# Altium PCB M74R3.PcbDoc
Units mm, origin at the board's own origin, x right, y up, seen from the top; angles counter-clockwise.
Board outline 65.25 x 17.5 mm, 2 copper layers (L1-Top Layer, L2-Botom Layer), stack 1.579 mm thick; 80 components, 38 nets, 192 pads, 52 vias.
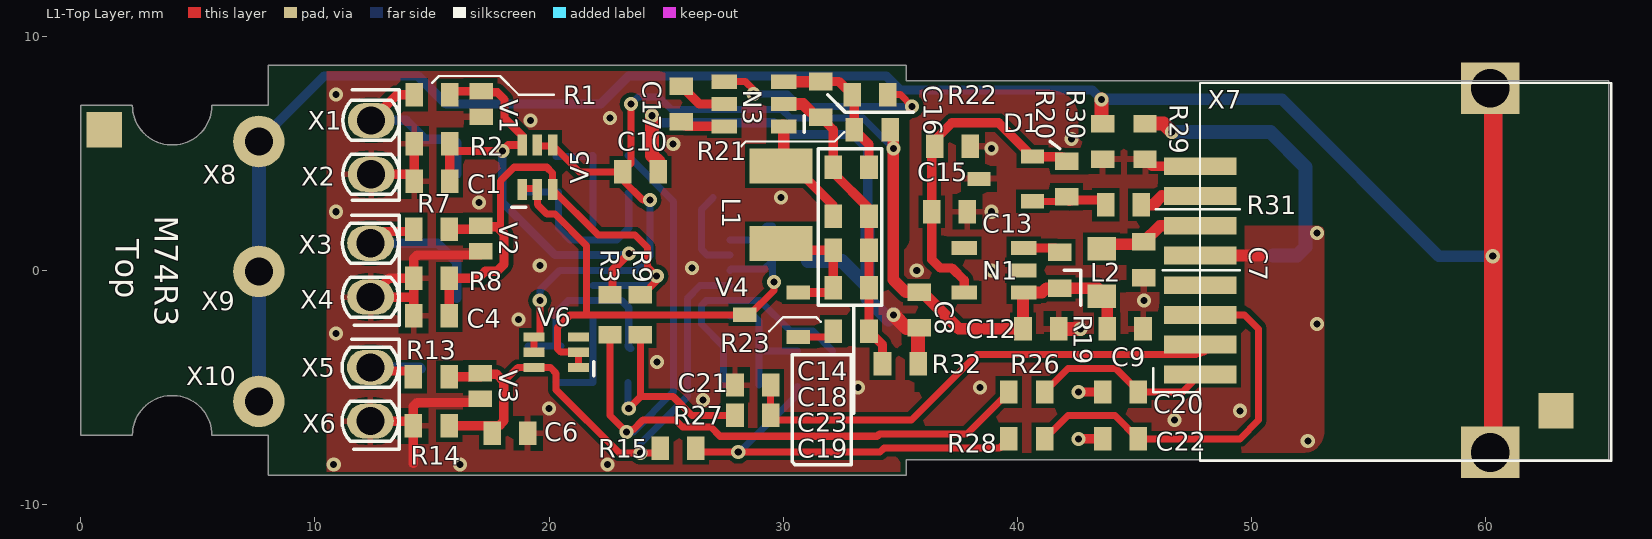
[diagram p0: L1-Top Layer view]
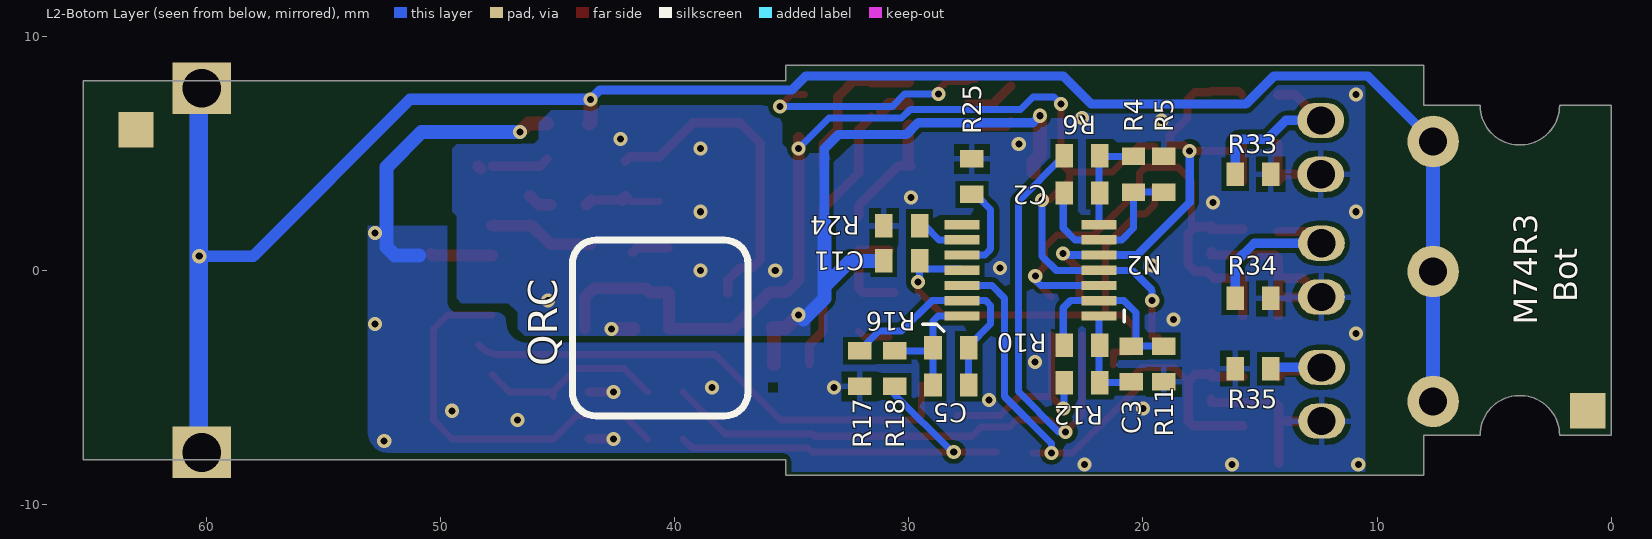
[diagram p1: L2-Botom Layer view, seen from below]

## Layer stack, top to bottom
Top Solder: solder mask 0.0102, Solder Resist, Dk 3.5
L1-Top Layer: signal copper 0.0356
Dielectric 1: dielectric 1.508, FR-4, Dk 4.8
L2-Botom Layer: signal copper 0.0356
Bottom Solder: solder mask 0.0102, Solder Resist, Dk 3.5

## Board outline
0,-7.05 2.2,-7.05 cw(c3.9,-7.05) 5.6,-7.05 8,-7.05 8,-8.75 35.25,-8.75 35.25,-8.1 65.25,-8.1 65.25,8.1 35.25,8.1 35.25,8.75 8,8.75 8,7.05 5.6,7.05 cw(c3.9,7.05) 2.2,7.05 0,7.05

## Design rules (kind name [scope] priority, off if disabled: settings)
Clearance [All] p1: gap=0.2 ignorepadtopadclearanceinfootprint=TRUE
ComponentClearance [All] p1 off: gap=0 collisioncheckmode=3 verticalgap=0 showdistances=FALSE
FanoutControl Fanout_LCC [IsLCC] p1: bgadir=Out bgaviamode=Centered fanoutstyle=Auto fanoutdirection=Alternating viagrid=0.025 // Fanout_LCC (Default Rule)
FanoutControl Fanout_BGA [IsBGA] p2: bgadir=Out bgaviamode=Centered fanoutstyle=Auto fanoutdirection=Alternating viagrid=0.025 // Fanout_BGA (Default Rule)
FanoutControl Fanout_Small [(CompPinCount < 5)] p3: bgadir=Out bgaviamode=Centered fanoutstyle=Auto fanoutdirection=OutThenIn viagrid=0.025 // Fanout_Small (Default Rule)
FanoutControl Fanout_SOIC [IsSOIC] p4: bgadir=Out bgaviamode=Centered fanoutstyle=Auto fanoutdirection=Alternating viagrid=0.025 // Fanout_SOIC (Default Rule)
PolygonConnect PolygonConnect_via [isVia] p1: connectstyle=Direct reliefconductorwidth=0.254 reliefentries=4 polygonreliefangle="90 Angle" airgapwidth=0.254
PolygonConnect [All] p2: connectstyle=Relief reliefconductorwidth=0.254 reliefentries=4 polygonreliefangle="90 Angle" airgapwidth=0.254
RoutingVias [All] p1: holewidth=0.5 width=0.8 viastyle="Through Hole" minholewidth=0.1 minwidth=0.4 maxholewidth=1.3 maxwidth=2
SolderMaskExpansion [All] p1: expansion=0.102 istentingtop=FALSE
SupplyNets "Schematic Supply Nets_6" [InNet('PGND1')] p1: voltage=0.000
SupplyNets "Schematic Supply Nets_5" [InNet('-5V')] p2: voltage=0.000
SupplyNets "Schematic Supply Nets_4" [InNet('GNDSIG')] p3: voltage=0.000
SupplyNets "Schematic Supply Nets_2" [InNet('+5V_IN')] p4: voltage=0.000
SupplyNets "Schematic Supply Nets_1" [InNet('GND')] p5: voltage=0.000
SupplyNets "Schematic Supply Nets" [InNet('+5V')] p6: voltage=0.000
Width [All] p1: maxlimit=8 minlimit=0.254 preferedwidth=0.254
25 further rules are at their usual default settings.

## Components (designator, comment, footprint, x,y, rotation, side; value= is the part's Value field where it differs from the comment)
C1 "10n" Z0603#1 15,3.8 r180 top
C2 "*47p" Z0603#1 22.6,3.3 r0 bottom
C3 "*47p" Z0603#1 20.5,-4 r90 bottom
C4 "10n" Z0603#1 14.973,-1.945 r180 top
C5 "*47p" Z0603#1 28.2,-4.9 r180 bottom
C6 "10n" Z0603#1 18.33,-6.959 r0 top
C7 "10u" Z0603#1 45.4,0.45 r270 top
C8 "1u0" Z0603#1 35.8,-1.7 r270 top
C9 "100n" Z0603#1 44.6,-2.5 r0 top
C10 "33n" Z0603#1 23.9,4.2 r0 top
C11 "33n" Z0603#1 30.3,0.4 r0 bottom
C12 "10u" Z0603#1 41,-2.5 r0 top
C13 "10u" Z0603#1 37.1,2.5 r0 top
C14 "10u" Z0603#1 32.9,4.4 r0 top
C15 "33n" Z0603#1 37.23,5.295 r0 top
C16 "33n" Z0603#1 31.6,7.3 r90 top
C17 "1u0" Z0603#1 25.649,7.1 r90 top
C18 "10u" Z0603#1 32.9,2.3 r180 top
C19 "10u" Z0603#1 32.9,-0.751 r180 top
C20 "*47p" Z0603#1 44.4,-5.2 r180 top
C21 "*47p" Z0603#1 28.7,-4.9 r180 top
C22 "*47p" Z0603#1 44.4,-7.2 r180 top
C23 "100n" Z0603#1 32.9,0.849 r0 top
D1 "11AA010T-I/TT" ZSOT23A 39.5,3.9 r180 top
L1 "150uH" Z1210 29.9,2.8 r270 top
L2 "BLM21PG221SN1D" Z0805 43.6,-0.1 r90 top
N1 "TPS70933DBV" ZSOT23_5 39,0 r180 top
N2 "OPA4991IPWR" ZTSSOP14 24.8,0 r0 bottom
N3 "LM2776DBVT" ZSOT23_6 28.749,7.1 r180 top
R1 "1K0" Z0603#1 15,7.5 r0 top
R2 "220K" Z0603#1 15,5.4 r180 top
R3 "*0R0" Z0603#2 22.6,-1.9 r270 top
R4 "5K1" Z0603#1 20.4,4.1 r270 bottom
R5 "1K0" Z0603#1 19.1,4.1 r90 bottom
R6 "100R" Z0603#1 22.6,4.9 r0 bottom
R7 "1K0" Z0603#1 14.973,1.755 r0 top
R8 "220K" Z0603#1 14.973,-0.345 r180 top
R9 "*0R0" Z0603#2 23.9,-1.9 r270 top
R10 "5K1" Z0603#1 22.6,-3.2 r0 bottom
R11 "1K0" Z0603#1 19.1,-4 r270 bottom
R12 "100R" Z0603#1 22.6,-4.8 r0 bottom
R13 "1K0" Z0603#1 14.966,-4.545 r0 top
R14 "220K" Z0603#1 14.966,-6.645 r180 top
R15 "*0R0" Z0603#1 25.5,-7.6 r0 top
R16 "5K1" Z0603#1 28.2,-3.3 r180 bottom
R17 "1K0" Z0603#1 32.1,-4.2 r270 bottom
R18 "100R" Z0603#1 30.6,-4.2 r270 bottom
R19 "0R0" Z0603#1 41.8,0 r90 top
R20 "100K" Z0603#1 42.1,3.9 r270 top
R21 "0R0" Z0603#1 33.8,6 r180 top
R22 "10K" Z0603#1 33.7,7.5 r0 top
R23 "1K0" Z0603#1 32.9,-2.6 r180 top
R24 "0R0" Z0603#1 30.3,1.9 r180 bottom
R25 "0R0" Z0603#1 27.3,4 r270 bottom
R26 "0R0" Z0603#1 40.4,-5.2 r0 top
R27 "0R0" Z0603#1 28.7,-6.2 r0 top
R28 "0R0" Z0603#1 40.4,-7.2 r0 top
R29 "0R0" Z0603#1 45.45,5.5 r270 top
R30 "*0R0" Z0603#1 43.65,5.5 r90 top
R31 "56R" Z0603#1 44.525,2.8 r180 top
R32 "0R0" Z0603#3 35,-4 r180 top
R33 "NU 0603" Z0603#3 15.3,4.1 r0 bottom
R34 "NU 0603" Z0603#3 15.3,-1.2 r0 bottom
R35 "NU 0603" Z0603#3 15.3,-4.2 r180 bottom
V1 "*CPDUC1V8HT-HF" ZSOD523F 17.1,7.1 r90 top
V2 "*CPDUC1V8HT-HF" ZSOD523F 17.073,1.355 r90 top
V3 "*CPDUC1V8HT-HF" ZSOD523F 17.066,-4.945 r90 top
V4 "BSH108" ZSOT23 29.5,-1.9 r180 top
V5 "BAT54BRW" ZSOT363 19.5,4.4 r90 top
V6 "BAT54BRW" ZSOT363 20.3,-3.5 r180 top
X1 "*Dira 1,2mm" HOLE_012_P_020x015 12.4,6.4 r0 top
X2 "*Dira 1,2mm" HOLE_012_P_020x015 12.4,4.1 r0 top
X3 "*Dira 1,2mm" HOLE_012_P_020x015 12.373,1.155 r0 top
X4 "*Dira 1,2mm" HOLE_012_P_020x015 12.373,-1.145 r0 top
X5 "*Dira 1,2mm" HOLE_012_P_020x015 12.366,-4.145 r0 top
X6 "*Dira 1,2mm" HOLE_012_P_020x015 12.366,-6.445 r0 top
X7 "RJLSE4238101" RJLSE4238101 53.8,0 r90 top
X8 "*Dira 1.2 mm" HOLE_012_P_022 7.6,5.5 r0 top
X9 "*Dira 1.2 mm" HOLE_012_P_022 7.6,-0.05 r0 top
X10 "*Dira 1.2 mm" HOLE_012_P_022 7.6,-5.6 r0 top

## Footprints (in the part's own frame and the unit in brackets; to place one, negate y for a bottom-side part, rotate by r counter-clockwise, add the part's x,y. Pads: shape width x height; smd on the part's side, far side on the other; paste and mask are expansions set on the pad)
HOLE_012_P_020x015 [mm] "Dira 1.2mm, ovalna ploska 2x1.5mm"
  oval 2x1.5 hole 1.2 mask+0.05: 1(0,0)
  silkscreen extent -1.21,-0.85 1.21,0.85
HOLE_012_P_022 [mm]
  round 2.2 hole 1.2 mask+0.05: 1(0,0)
RJLSE4238101 [mm] "RJ45 flat profile, w/o LED, SMD version"
  rect 0.76x3.1 smd: 1(-4.445,6) 2(-3.175,6) 3(-1.905,6) 4(-0.635,6) 5(0.635,6) 6(1.905,6) 7(3.175,6) 8(4.445,6)
  rect 2.2x2.5 hole 1.65: 9(-7.78,-6.4) 9(7.78,-6.4)
  silkscreen extent -8.13,-11.56 8,8, body extent -8.05,-11.51 8.05,7.09, height 11.96
Z0603#1 [mm]
  rect 0.75x1 smd mask+0.05: 1(-0.762,0) 2(0.762,0)
Z0603#2 [mm]
  rect 0.75x1 smd mask+0.05: 1(-0.862,0) 2(0.862,0)
Z0603#3 [mm]
  rect 0.75x1 smd paste-0.05 mask+0.05: 1(-0.762,0) 2(0.762,0)
Z0805 [mm]
  rect 1x1.2 smd paste-0.06 mask+0.05: 1(-1.016,0) 2(1.016,0)
Z1210 [mm]
  rect 1.5x2.7 smd paste-0.205 mask+0.1: 1(-1.651,0) 2(1.651,0)
ZSOD523F [mm]
  rect 0.7x1 smd paste-0.085 mask+0.05: 1(-0.55,0) 2(0.55,0)
ZSOT23 [mm]
  rect 1x0.6 smd mask+0.05: 1(-1.143,0.952) 2(1.143,0) 3(-1.143,-0.953)
ZSOT23_5 [mm]
  rect 1.1x0.6 smd mask+0.05: 1(-1.27,0.952) 2(-1.27,0) 3(-1.27,-0.953) 4(1.27,-0.952) 5(1.27,0.953)
ZSOT23_6 [mm]
  rect 1.1x0.6 smd mask+0.05: 1(-1.27,0.952) 2(-1.27,0) 3(-1.27,-0.953) 4(1.27,-0.953) 5(1.27,0) 6(1.27,0.952)
ZSOT23A [mm]
  rect 1x0.6 smd mask+0.05: 1(-1.143,0.952) 2(-1.143,-0.953) 3(1.143,0)
ZSOT363 [mm]
  rect 0.9x0.4 smd paste-0.045 mask+0.05: 1(-0.953,0.65) 2(-0.953,0) 3(-0.953,-0.65) 4(0.953,-0.65) 5(0.953,0) 6(0.953,0.65)
ZTSSOP14 [mm]
  rect 1.5x0.4 smd paste-0.115 mask+0.05: 1(-2.921,1.95) 2(-2.921,1.3) 3(-2.921,0.65) 4(-2.921,0) 5(-2.921,-0.65) 6(-2.921,-1.3) 7(-2.921,-1.95) 8(2.921,-1.95) 9(2.921,-1.3) 10(2.921,-0.65) 11(2.921,0) 12(2.921,0.65) 13(2.921,1.3) 14(2.921,1.95)

## Part data
C1 C4 C6: library part C, Tolerance=C0G, Voltage=50V, Assembled=Automat, MEgA_ID=51625, PCB Footprint=Z0603, Size=0603
  C1: Group="Proud I1", Part Reference=C1
  C4: Group="Proud I2", Part Reference=C4
  C6: Group="Proud I3", Part Reference=C6
C2 C3 C5 C20 C21 C22: library part C, Manufacturer=CL10C470JB8NNNC, Tolerance=C0G, Voltage=50V, Assembled=Neosadit, MEgA_ID=51568, PCB Footprint=Z0603, Size=0603
  C2: Group="Proud I1", Part Reference=C2
  C3: Group="Proud I2", Part Reference=C3
  C5: Group="Proud I3", Part Reference=C5
  C20: Group="Proud I1", Part Reference=C20
  C21: Group="Proud I1", Part Reference=C21
  C22: Group="Proud I1", Part Reference=C22
C7: library part C, Manufacturers part Reference=C0603C104K5RACTU, Package=0603, TEMP Grade="-55 to +125", Tolerance=X5R, Voltage=10V, Assembled=Automat, Group="L6A - PLL", MAKE=Kemet, MEgA_ID=51674, Part Reference=C7, PCB Footprint=Z0603, ROHS STATUS=COMPLIANT, Size=0603, TEMPERATURE GRADE="-55 to +125"
C8 C17: library part C, Tolerance=X7R, Voltage=16V, Assembled=Automat, MEgA_ID=51636, PCB Footprint=Z0603, Size=0603
  C8: Group="L6A - PLL", Part Reference=C8
  C17: Group="Měnič +5V/-5V", Part Reference=C17
C9 C10 C11 C15 C16 C23: library part C, Tolerance=X7R, Voltage=50V, Assembled=Automat, PCB Footprint=Z0603, Size=0603
  C9: Group="L6A - PLL", MEgA_ID=51623, Part Reference=C9
  C10: Group="Proud I1", MEgA_ID=51667, Part Reference=C10
  C11: Group="Proud I1", MEgA_ID=51667, Part Reference=C11
  C15: Group="DC 3V3", MEgA_ID=51667, Part Reference=C15
  C16: Group="Měnič +5V/-5V", MEgA_ID=51667, Part Reference=C16
  C23: Group="L6A - PLL", MEgA_ID=51623, Part Reference=C23
C12 C13 C14 C18 C19: library part C, Tolerance=X5R, Voltage=10V, Assembled=Automat, MEgA_ID=51674, PCB Footprint=Z0603, Size=0603
  C12: Group="DC 3V3", Part Reference=C12
  C13: Group="DC 3V3", Part Reference=C13
  C14: Group="Měnič +5V/-5V", Part Reference=C14
  C18: Group="Měnič +5V/-5V", Part Reference=C18
  C19: Group="Měnič +5V/-5V", Part Reference=C19
D1: library part DIODE2_K_0, Assembled=Automat, Group=Paměť, Manufacturer=11AA010T-I/TT, MEgA_ID=55686, Part Reference=D1, PCB Footprint=ZSOT23A, Size=SOT23
L1: library part INDUCTOR, Manufacturer=NLCV32T-151K-EF, Power="100mA  7R9", Assembled=Automat, Group="Měnič +5V/-5V", MEgA_ID=56074, Part Reference=L1, PCB Footprint=Z1210, Size=1210
L2: library part "Ferrite Bead_0", Power="2A 220R", Assembled=Automat, Group="L6A - PLL", MEgA_ID=56029, Part Reference=L2, PCB Footprint=Z0805, Size=0805
N1: library part MCP1801T_1, Power="150 mA", Voltage=3V3, Assembled=Automat, Group="DC 3V3", MEgA_ID=55875, Part Reference=N1, PCB Footprint=ZSOT23_5, Size=SOT23-5
N2: library part AD824, Voltage=5...26V/2.7V...40V, Assembled=Automat, Group="Proud I2", Manufacturer=OPA4991IPWR, MEgA_ID=55657.02, Part Reference=N2, PCB Footprint=ZTSSOP14, Size=TSSOP14
N3: library part LM2776_0, Power=200mA, Voltage=2V7...+5V, Assembled=Automat, Group="Měnič +5V/-5V", Manufacturer=LM2776DBVT, MEgA_ID=58108, Part Reference=N3, PCB Footprint=ZSOT23_6, Size=SOT23-6
R1 R5 R6 R7 R11 R12 R13 R17 R18 R20 R22 R23 R33 R34 R35: library part R, Power=0.0625W, Tolerance=1%, Voltage=75V, PCB Footprint=Z0603, Size=0603
  R1: Assembled=Automat, Group="Proud I1", MEgA_ID=50559, Part Reference=R1
  R5: Assembled=Automat, Group="Proud I1", MEgA_ID=50559, Part Reference=R5
  R6: Assembled=Automat, Group="Proud I1", MEgA_ID=50529, Part Reference=R6
  R7: Assembled=Automat, Group="Proud I2", MEgA_ID=50559, Part Reference=R7
  R11: Assembled=Automat, Group="Proud I2", MEgA_ID=50559, Part Reference=R11
  R12: Assembled=Automat, Group="Proud I2", MEgA_ID=50529, Part Reference=R12
  R13: Assembled=Automat, Group="Proud I3", MEgA_ID=50559, Part Reference=R13
  R17: Assembled=Automat, Group="Proud I3", MEgA_ID=50559, Part Reference=R17
  R18: Assembled=Automat, Group="Proud I3", MEgA_ID=50529, Part Reference=R18
  R20: Assembled=Automat, Group=Paměť, MEgA_ID=50500, Part Reference=R20
  R22: Assembled=Automat, Group="Měnič +5V/-5V", MEgA_ID=50558, Part Reference=R22
  R23: Assembled=Automat, Group="Měnič +5V/-5V", MEgA_ID=50559, Part Reference=R23
  R33: Assembled=Neosadit, Group="Proud I1", MEgA_ID=24038, Part Reference=R33
  R34: Assembled=Neosadit, Group="Proud I2", MEgA_ID=24038, Part Reference=R34
  R35: Assembled=Neosadit, Group="Proud I3", MEgA_ID=24038, Part Reference=R35
R2 R8 R14: library part R, Manufacturer=RC0603FR-07220KL, Tolerance=1%, Voltage=75V, Assembled=Automat, MEgA_ID=50756, PCB Footprint=Z0603, Size=0603
  R2: Group="Proud I1", Part Reference=R2
  R8: Group="Proud I2", Part Reference=R8
  R14: Group="Proud I3", Part Reference=R14
R3 R9 R15 R19 R21 R24 R25 R26 R27 R28 R29 R30 R32: library part R, Power="0.0625W max. 2A", Tolerance=1%, Voltage=75V, MEgA_ID=50678, PCB Footprint=Z0603, Size=0603
  R3: Assembled=Neosadit, Group="Proud I1", Part Reference=R3
  R9: Assembled=Neosadit, Group="Proud I2", Part Reference=R9
  R15: Assembled=Neosadit, Group="Proud I3", Part Reference=R15
  R19: Assembled=Automat, Group="Proud I1", Part Reference=R19
  R21: Assembled=Automat, Group="Měnič +5V/-5V", Part Reference=R21
  R24: Assembled=Automat, Part Reference=R24
  R25: Assembled=Automat, Part Reference=R25
  R26: Assembled=Automat, Group="Proud I1", Part Reference=R26
  R27: Assembled=Automat, Group="Proud I1", Part Reference=R27
  R28: Assembled=Automat, Group="Proud I1", Part Reference=R28
  R29: Assembled=Automat, Group="Proud I1", Part Reference=R29
  R30: Assembled=Neosadit, Group="Proud I1", Part Reference=R30
  R32: Assembled=Automat, Group="Proud I1", Part Reference=R30
R4 R10 R16 R31: library part R, Tolerance=1%, Voltage=75V, Assembled=Automat, PCB Footprint=Z0603, Size=0603
  R4: Group="Proud I1", MEgA_ID=50728, Part Reference=R4
  R10: Group="Proud I2", MEgA_ID=50728, Part Reference=R10
  R16: Group="Proud I3", MEgA_ID=50728, Part Reference=R16
  R31: Group="Proud I2", MEgA_ID=50709, Part Reference=R31
V1 V2 V3: library part TRANSIL_BI, Manufacturer=CPDUC1V8HT-HF, Power="160W Bi 0.1uA", Voltage=1V8/2V3/8V, Assembled=Neosadit, Group="Proud I1", MEgA_ID=52330, PCB Footprint=ZSOD523F, Size=SOD523F-2
  V1: Part Reference=V1
  V2: Part Reference=V2
  V3: Part Reference=V3
V4: library part "MOSFET N", Power="0.83W, Ic=1.2A", Voltage=Uds=30V,Ugs=20V, Assembled=Automat, Group="Měnič +5V/-5V", MEgA_ID=53010, Part Reference=V4, PCB Footprint=ZSOT23, Size=SOT23
V5 V6: library part DIODE2x2_AK_2, Power=200mA, Voltage="30V @1V", Assembled=Automat, Group="L3 - Napeti", Manufacturer=BAT54BRW, MEgA_ID=52063, PCB Footprint=ZSOT363, Size=SOT363
  V5: Part Reference=V5
  V6: Part Reference=V6
X1: library part SP1, "I1", Assembled=Neosadit, Group="Proud I1", MEgA_ID=90058, Part Reference=X1, PCB Footprint=HOLE_008_P_015, Size="d=2/1,5 mm"
X2: library part SP1, "I1G", Assembled=Neosadit, Group="Proud I1", MEgA_ID=90058, Part Reference=X2, PCB Footprint=HOLE_008_P_015, Size="d=2/1,5 mm"
X3: library part SP1, "I2", Assembled=Neosadit, Group="Proud I2", MEgA_ID=90058, Part Reference=X3, PCB Footprint=HOLE_008_P_015, Size="d=2/1,5 mm"
X4: library part SP1, "I2G", Assembled=Neosadit, Group="Proud I2", MEgA_ID=90058, Part Reference=X4, PCB Footprint=HOLE_008_P_015, Size="d=2/1,5 mm"
X5: library part SP1, "I3", Assembled=Neosadit, Group="Proud I3", MEgA_ID=90058, Part Reference=X5, PCB Footprint=HOLE_008_P_015, Size="d=2/1,5 mm"
X6: library part SP1, "I3G", Assembled=Neosadit, Group="Proud I3", MEgA_ID=90058, Part Reference=X6, PCB Footprint=HOLE_008_P_015, Size="d=2/1,5 mm"
X7: library part RJ45_Shielded, Assembled=Automat, Manufacturer Part Number=RJLSE4238101, MEgA_ID=81250, Part Reference=X7, PCB_Footprint=RJ45, Size=RJ45
X8 X9 X10: library part SP1, "SH", Assembled=Neosadit, MEgA_ID=90034, Part Reference=X8, PCB Footprint=HOLE_012_P_022, Size="d=1.2/2.2 mm"

## Free pads (board coordinates)
  rect 1.5x1.5 smd far side: Fid(1,-6) Fid(63,6)
  rect 1.5x1.5 smd: Fid(1,6) Fid(63,-6)

## Via types
v1: diameter 0.6, hole 0.3, L1-Top Layer to L2-Botom Layer, tented both sides, 52 vias

## Nets (pads, with @x,y where several pads share a name; then routed paths per layer and width w, separated by ;. In a path a pad name is that pad's centre, name@x,y a point inside that pad or via, vN(x,y) a via of type N, cw(c..) or ccw(c..) an arc to the next point about the centre after c; other vN are vias at no path point)
+5V: C8.1 C9.1 C10.1 C12.1 L2.1 N1.1 N2.4 R19.1 R21.1 V5.4 V5.5 V6.4 V6.5 | length 50.8
  L1-Top Layer w0.3: V6.5 V6.4 ; V5.5@19.509,5.3 V5.4@20.159,5.3 ; V6.4@19.6,-2.85 v1(19.6,-1.3) ; V5.4 21.302,4.2 C10.1 ; v1(23.5,7.1) 23.5,4.562 C10.1 ; v1(24.3,3) 24,3 23.138,3.862 C10.1
  L1-Top Layer w0.5: R21.1@34.7,5.662 v1(34.7,5.2) 34.7,-0.4 35.238,-0.938 C8.1 35.938,-0.938 37.5,-2.5 C12.1 40.238,-0.985 N1.1 41.047,-0.953 41.238,-0.762 R19.1 43.446,-0.762 43.838,-1.154 C9.1
  L2-Botom Layer w0.3: v1(19.6,-1.3) 19.6,-0.854 20.454,0 23.7,0 24.3,0.6 v1(24.3,3) ; v1(23.5,7.1) 23.8,7.4 24.688,7.4 25.221,6.867 29.933,6.867 30.3,6.5 33.4,6.5 v1(34.7,5.2)
+5V_IN: C7.1 L2.2 X7.6 | length 4.5
  L1-Top Layer w0.5: L2.2@43.6,1.116 45.304,1.116 C7.1 46.093,1.905 X7.6
-5V: C11.1 N2.11 V4.2 V5.1 V5.2 V6.1 V6.2 | length 22.6
  L1-Top Layer w0.3: V5.1@18.889,3.5 V5.2@19.539,3.5 ; V5.2 19.5,2.8 19.9,2.4 20.244,2.4 21.596,1.047 21.596,-1.9 ; V6.1@21.253,-4.046 V6.2 20.5,-3.5 20.36,-3.36 20.36,-2.44 20.9,-1.9 21.596,-1.9 ; v1(29.6,-0.5) 29.6,-0.857 28.557,-1.9 21.596,-1.9
  L2-Botom Layer w0.3: N2.11 27.769,0.048 29.186,0.048 C11.1 29.538,-0.438 v1(29.6,-0.5)
GND: C7.2 C8.2 C9.2 C10.2 C11.2 C12.2 C13.2 C15.2 D1.3 N1.2 R29.2 R30.1 R32.1 X7.8 | length 29.7
  L1-Top Layer w0.4: R29.2 45.743,4.445 X7.8
  L1-Top Layer w0.5: X7.8@48.278,4.338 X7.8@48.385,4.445
  L1-Top Layer w0.6: v1(24.4,6.6) 24.4,4.9 24.662,4.638 C10.2 ; v1(34.7,-1.9) 35.262,-2.462 C8.2 35.762,-2.5 R32.1 ; C12.2 v1(42.7,-2.5)
  L2-Botom Layer w0.4: v1(24.4,6.6) 24.7,6.3 29.6,6.3 30.1,5.8 33,5.8 33.6,5.2 33.6,2
  L2-Botom Layer w0.6: C11.2 32.5,0.4 33.6,-0.7 ; 33.6,2 33.6,-0.7 ; v1(34.7,-1.9) 34.5,-2.1 33.6,-1.2 33.6,-0.7
  other v1: 45.4,-1.3 35.7,0 38.9,0 38.9,2.5 38.9,5.2 42.3,5.6
GNDSIG: C1.2 C4.2 C6.2 C20.2 C21.2 C22.2 R2.2 R5.2 R8.2 R11.2 R14.2 R17.2 R24.1 R25.1 R29.1 R33.1 R34.1 R35.1 V1.1 V2.1 V3.1 X2.1 X4.1 X6.1 X7.5 | length 37.8
  L1-Top Layer w0.4: X6.1 14.004,-6.445 R14.2 ; X2.1 13.938,4.1 C1.2 R2.2 ; 14.204,-8.245 R14.2 ; C4.2 14.211,-1.145 ; V3.1 17.066,-5.645 14.366,-5.645 14.204,-5.807 R14.2 ; V2.1 17.073,0.655 14.373,0.655 14.211,0.493 R8.2 ; v1(42.6,-7.2) C22.2 ; v1(42.6,-5.2) C20.2 ; 14.211,-1.145 R8.2 ; 14.211,-1.145 X4.1 13.173,-0.345 R8.2
  L1-Top Layer w0.5: X7.5 50.335,0.635 50.4,0.7
  L1-Top Layer w0.6: R29.1 46.238,6.262 v1(46.6,5.9)
  L2-Botom Layer w0.6: v1(46.6,5.9) 50.8,5.9 52.3,4.4 52.3,1 51.935,0.635 50.925,0.635
  other v1: 10.8,-8.3 16.2,-8.3 22.5,-8.3 52.4,-7.3 46.7,-6.4 49.5,-6 20,-5.9 26.573,-5.534 33.2,-5 38.4,-5 24.612,-3.921 10.9,-2.7 52.8,-2.3 18.7,-2.1 26.1,0.1 19.6,0.2 52.8,1.6 10.9,2.5 17,2.9 29.9,3.1 25.3,5.4 19.2,6.4 22.6,6.5 10.9,7.5
NetC1_1: C1.1 N2.5 R1.2 R2.1 R3.1 V1.2 V5.6 | length 20.2
  L1-Top Layer w0.35: R2.1@15.762,5.1 v1(18,5.1) 18.252,5.352 V5.6 18.85,5.75 18.1,6.5 18.1,7.3 17.8,7.6 V1.2@17.15,7.6 ; R1.2 15.912,7.65 V1.2 ; R3.1@22.7,-1.138 22.7,0.011 v1(23.404,0.715)
  L1-Top Layer w0.4: C1.1 15.762,5.1 R2.1
  L2-Botom Layer w0.35: v1(18,5.1) 18,2.9 20.25,0.65 N2.5 23.339,0.65 v1(23.404,0.715)
NetC2_1: C2.1 N2.7 R4.1 R6.1 | length 4.5
  L2-Botom Layer w0.3: R4.1@20.3,4.862 R4.1 21.8,4.862 ccw(c21.8,4.9) R6.1 cw(c21.838,4.859) 21.879,4.859 N2.7
NetC2_2: C2.2 N2.6 R4.2 R5.1 | length 7.8
  L2-Botom Layer w0.3: R5.1 R4.2@20.3,3.338 ; R4.2 20.4,1.8 20.9,1.3 N2.6 22.9,1.3 23.4,1.8 C2.2@23.4,3.243 ; C2.2@23.424,3.238 cw(c23.424,3.3) C2.2@23.4,3.243 ; C2.2@23.4,3.243 cw(c23.424,3.3) C2.2 cw(c23.362,3.262) 23.4,3.262 C2.2@23.4,3.243
NetC3_1: C3.1 N2.1 R10.1 R12.1 | length 4.4
  L2-Botom Layer w0.3: C3.1@20.3,-4.762 ccw(c20.338,-4.762) 20.338,-4.8 R12.1 ccw(c21.838,-4.759) 21.879,-4.759 N2.1
NetC3_2: C3.2 N2.2 R10.2 R11.1 | length 8.1
  L2-Botom Layer w0.3: R11.1 C3.2@20.3,-3.238 ; C3.2 C3.2@20.3,-3.238 ; R10.2@23.5,-3.338 cw(c23.5,-3.2) R10.2 ccw(c23.362,-3.162) 23.4,-3.162 23.4,-1.6 23.1,-1.3 N2.2 20.8,-1.3 20.3,-1.8 C3.2@20.3,-3.238
NetC4_1: C4.1 N2.3 R7.2 R8.1 R9.1 V2.2 V5.3 | length 24.2
  L1-Top Layer w0.3: 17.923,1.705 17.923,1.855 17.923,3.823 18.5,4.4 19.9,4.4 20.15,4.15 V5.3 22.097,1.5 23.669,1.5 24.2,0.969 24.2,0.149 v1(24.595,-0.246) 24.608,-0.246 24.7,-0.338 R9.1@23.9,-1.138
  L1-Top Layer w0.4: C4.1 R8.1 16.973,-0.345 17.273,-0.045 17.773,-0.045 18.073,0.255 18.073,1.555 17.923,1.705 17.773,1.855 17.123,1.855 V2.2 17.073,1.755 R7.2
  L2-Botom Layer w0.3: N2.3 24.35,-0.65 24.595,-0.405 v1(24.595,-0.246)
NetC5_1: C5.1 N2.14 R16.1 R18.1 | length 5.8
  L2-Botom Layer w0.3: N2.14 28.75,-1.95 28.962,-2.162 R16.1 ; C5.1 R16.1 ; R18.1 29.1,-3.438 R16.1
NetC5_2: C5.2 N2.13 R16.2 R17.1 | length 10.4
  L2-Botom Layer w0.3: C5.2 R16.2 27.438,-3.238 26.5,-2.3 26.5,-1.5 26.7,-1.3 N2.13 29,-1.3 30.3,-2.6 31.262,-2.6 R17.1
NetC6_1: C6.1 N2.12 R13.2 R14.1 R15.1 V3.2 V6.6 | length 25
  L1-Top Layer w0.3: 18.066,-4.745 18.661,-4.15 V6.6 20.05,-4.15 20.3,-4.4 20.3,-5.103 22.997,-7.8 v1(23.9,-7.8) R15.1@24.7,-7.8
  L1-Top Layer w0.4: R14.1 17.855,-6.645 18.066,-6.434 18.066,-4.745 17.766,-4.445 17.116,-4.445 V3.2 17.066,-4.545 R13.2
  L2-Botom Layer w0.3: v1(23.9,-7.8) 23.9,-7.4 25.9,-5.4 25.9,-1.2 26.45,-0.65 N2.12
NetC13_1: C13.1 C15.1 D1.2 N1.5 R20.1 | length 14.1
  L1-Top Layer w0.4: N1.5 37.73,-0.43 37.2,0.1 36.7,0.1 36.338,0.462 C13.1 36.338,5.3 36.338,5.438 37.2,6.3 39.195,6.3 D1.2 41.909,4.852 R20.1
NetC14_2: C14.2 C16.2 N3.3 R21.2 R22.1 | length 6.5
  L1-Top Layer w0.4: C16.2 32.376,8.062 R22.1 33.038,7.4 R21.2 33.662,5.376 C14.2
  L1-Top Layer w0.5: N3.3 C16.2@31.591,8.053
NetC17_1: C17.1 N3.6 | length 1.9
  L1-Top Layer w0.4: C17.1 25.84,6.148 N3.6
NetC17_2: C17.2 N3.5 | length 2.1
  L1-Top Layer w0.4: C17.2 26.411,7.1 N3.5
NetC18_2: C18.2 L1.1 N3.1 | length 5.2
  L1-Top Layer w0.4: L1.1@30.019,4.57 L1.1 30.449,4.451 32.138,2.762 C18.2
  L1-Top Layer w0.5: N3.1@29.972,6.2 30.019,6.153 N3.1 L1.1@30.019,4.57
NetC19_2: C19.2 C23.1 L1.2 V4.3 | length 4.5
  L1-Top Layer w0.4: V4.3 30.843,-0.947 31.941,-0.947 C19.2 C23.1 L1.2@30.843,0.849 ; L1.2@30.843,0.849 30.843,0.856 30.836,0.849 L1.2@30.843,0.849
NetC20_1: C20.1 R26.2 X7.1 | length 8
  L1-Top Layer w0.3: R26.2 42.162,-4.2 44.2,-4.2 45.162,-5.162 C20.1 ; C20.1@45.162,-5.4 C20.1 ; X7.1 47.045,-5.2 C20.1
NetC21_1: C21.1 R27.2 X7.2 | length 21.6
  L1-Top Layer w0.3: C21.1 R27.2 29.662,-6.4 35.474,-6.4 38.274,-3.6 47.462,-3.6 ccw(c47.462,-2.421) X7.2@48.375,-3.167
NetC22_1: C22.1 R28.2 X7.3 | length 16.9
  L1-Top Layer w0.3: R28.2 42.162,-6.2 44.162,-6.2 C22.1 49.5,-7.2 50.3,-6.4 50.3,-2.5 49.705,-1.905 X7.3
NetD1_1: D1.1 R20.2 R31.2 | length 3.3
  L1-Top Layer w0.3: D1.1 41.909,2.947 R20.2
  L1-Top Layer w0.4: R20.2@42.238,3 R31.2@43.563,3
  L1-Top Layer w0.5: R20.2 R20.2@42.238,3 ; R31.2@43.563,3 R31.2
NetN1_3: N1.3 R19.2 | length 1.6
  L1-Top Layer w0.4: N1.3 41.61,0.953 R19.2
NetN2_9: N2.9 R24.2 | length 2.1
  L2-Botom Layer w0.3: N2.9 28.7,1.3 29.3,1.9 R24.2
NetN2_10: N2.10 R25.2 | length 3.7
  L2-Botom Layer w0.3: R25.2@27,3.1 26.5,2.6 26.5,0.9 26.75,0.65 N2.10
NetN3_4: N3.4 R22.2 | length 10.2
  L1-Top Layer w0.3: N3.4@27.138,8.153 N3.4@27.479,8.153 ; N3.4 28.388,8.053 28.743,7.698 28.743,7.534 v1(28.735,7.526) ; R22.2 35,7.5 v1(35.5,7)
  L2-Botom Layer w0.3: v1(28.735,7.526) 30.174,7.526 30.7,7 v1(35.5,7)
NetR1_1: R1.1 R33.2 X1.1 | length 7.7
  L1-Top Layer w0.4: X1.1 13.5,7.5 R1.1
  L2-Botom Layer w0.4: X1.1 13.9,6.4 14.7,5.6 15.9,5.6 16.062,5.438 R33.2
NetR3_2: R3.2 R6.2 R26.1 | length 35.6
  L1-Top Layer w0.3: R3.2 22.6,-6.2 23.2,-6.8 23.6,-6.8 24,-6.4 25.4,-6.4 25.7,-6.7 26.912,-6.7 27.3,-7.088 34.012,-7.088 34.1,-7 37.838,-7 R26.1
  L2-Botom Layer w0.3: v1(23.3,-6.9) 23.6,-6.9 25.317,-5.183 25.317,2.945 R6.2
NetR7_1: R7.1 R34.2 X3.1 | length 7.6
  L1-Top Layer w0.4: X3.1 12.873,1.655 R7.1@14.211,1.655
  L2-Botom Layer w0.4: X3.1 15.245,1.155 16.062,0.338 R34.2
NetR9_2: R9.2 R12.2 R27.1 | length 8.8
  L1-Top Layer w0.3: v1(23.4,-5.9) 23.9,-5.4 ; R9.2 23.9,-5.4 ; R27.1 26.1,-6.2 25.3,-5.4 23.9,-5.4
  L2-Botom Layer w0.3: v1@23.362,-5.862 R12.2
NetR13_1: R13.1 R35.2 X5.1 | length 4.2
  L1-Top Layer w0.4: X5.1 12.521,-4.3 13.959,-4.3 R13.1
  L2-Botom Layer w0.4: X5.1 14.483,-4.145 R35.2
NetR15_2: R15.2 R18.2 R28.1 | length 17.5
  L1-Top Layer w0.3: R15.2@26.262,-7.762 v1(28.077,-7.762) 34.138,-7.762 34.3,-7.6 39.238,-7.6 R28.1
  L2-Botom Layer w0.3: v1(28.077,-7.762) 28.138,-7.762 30.6,-5.3 R18.2
NetR23_2: R23.2 V4.1 | length 1.4
  L1-Top Layer w0.3: V4.1@30.843,-2.852 31.886,-2.852 R23.2
NetR30_2: R30.2 X7.9 X8.1 X9.1 X10.1 | length 101.2
  L1-Top Layer w0.6: v1(43.6,7.3) 43.6,6.312 R30.2
  L1-Top Layer w0.8: X7.9@60.325,-7.75 X7.9@60.325,7.75
  L2-Botom Layer w0.4: X8.1 10.4,8.3 14.4,8.3 15.6,7.1 22.2,7.1 23.4,8.3 34.4,8.3 35,7.7 43.2,7.7 v1(43.6,7.3)
  L2-Botom Layer w0.5: v1(43.6,7.3) 51.3,7.3 58,0.6 v1(60.3,0.6) v1@60.325,0.6
  L2-Botom Layer w0.6: X10.1 X9.1 X8.1
  L2-Botom Layer w0.8: X7.9@60.325,-7.75 60.325,0.6 X7.9@60.325,7.75
NetR31_1: R31.1 X7.7 | length 1
  L1-Top Layer w0.5: R31.1 45.8,2.8 46.175,3.175
PGND1: C14.1 C16.1 C18.1 C19.1 C23.2 N3.2 R23.1 R32.2 | length 12.9
  L1-Top Layer w0.4: C16.1 32.138,6 C14.1 32.138,4.162 33.662,2.638 C18.1 C23.2 C19.1 R23.1 34.238,-3.176 R32.2
  L1-Top Layer w0.5: N3.2 30.849,7.1 C16.1@31.149,6.8
pads on no net: N1.4 N2.8 V6.3 X7.4

## Polygon pours and split planes (outlines as drawn)
GNDSIG on L2-Botom Layer "gndsig B1" (solid, remove dead copper, pour order 0): 10.5,-8.6 35,-8.6 35,-8.2 cw(c35.4,-8.2) 35.4,-7.8 52.2,-7.8 ccw(c52.2,-6.9) 53.1,-6.9 53.1,1.9 49.7,1.9 49.7,-1.4 cw(c49.3,-1.4) 49.3,-1.8 47.6,-1.8 ccw(c47.6,-2.2) 47.2,-2.2 cw(c46.3,-2.2) 46.3,-3.1 33.6,-3.1 33.6,4.224 31.23,6.5 23.4,6.5 cw(c23.4,7.4) 22.5,7.4 22.5,7.9 10.5,7.9
GND on L2-Botom Layer "gnd BL2" (solid, remove dead copper, pour order 3): 33.3,5 35,5 35.4,5.4 35.4,6.4 36.05,7.05 45.05,7.05 45.8,6.3 45.8,5.6 46,5.4 49.3,5.4 49.5,5.2 49.5,2.5 49.3,2.3 49.3,-1.2 49.1,-1.4 47.1,-1.4 46.7,-1.8 46.7,-2.5 46.4,-2.8 34.2,-2.8 34.2,-1.9 33.3,-1
GND on L1-Top Layer "gnd TL1" (solid, remove dead copper, pour order 2): 33.1,-3.1 33.8,-3.1 33.9,-3.2 ccw(c34.5,-3.2) 34.5,-3.8 ccw(c34.5,-3.2) 35.1,-3.2 35.1,-3.1 cw(c35.5,-3.1) 35.5,-2.7 46,-2.7 ccw(c46,-1.9) 46.8,-1.9 46.8,-0.8 cw(c48,-0.8) 48,0.4 48.8,0.4 ccw(c48.8,1) 49.4,1 49.4,5 ccw(c49,5) 49,5.4 43,5.4 cw(c43,5.8) 42.6,5.8 42.6,6.5 ccw(c41.4,6.5) 41.4,7.7 36,7.7 ccw(c36,7.1) 35.4,7.1 35.4,1.4 cw(c34.7,1.4) 34.7,0.7 33.1,0.7
GNDSIG on L1-Top Layer "gndsig TL2" (solid, remove dead copper, pour order 4): 10.5,8.5 10.5,-8.6 35,-8.6 35,-8.2 cw(c35.4,-8.2) 35.4,-7.8 52.2,-7.8 ccw(c52.2,-6.9) 53.1,-6.9 53.1,1.8 ccw(c53,1.8) 53,1.9 49.7,1.9 49.7,-1.4 cw(c49.3,-1.4) 49.3,-1.8 47.6,-1.8 ccw(c47.6,-2.2) 47.2,-2.2 cw(c46.3,-2.2) 46.3,-3.1 32.865,-3.1 32.865,8.5

## Silkscreen, mask and mechanical layers (free items; w line width, h text height)
Top Overlay:
  lines w0.1: 15,8 15.3,8.3 17.9,8.3 18.7,7.5 19.6,7.5 20.2,7.5 ; 28.2,5.3 28.4,5.5 32.2,5.5 32.6,5.9 ; 29.4,-2.6 30,-2 31.4,-2 31.6,-2.2 ; 45.9,2.6 49.5,2.6 ; 46.2,0 49.5,0
  lines w0.15: 11.566,-2.945 13.6,-2.945 13.6,-7.645 11.666,-7.645 ; 11.573,2.355 13.6,2.355 13.6,-2.345 11.673,-2.345 ; 11.6,3 13.6,3 13.6,7.7 11.6,7.7 ; 18.4,2.7 19,2.7 ; 21.9,-4.5 21.9,-3.9 ; 30.9,5.9 30.9,6.6 ; 31.9,7.5 32.66,6.74 35.54,6.74 ; 32.9,-6.1 33,-6.1 33,-1.6 ; 41.4,5.5 41.8,5.2 ; 42,0 42.7,0 42.7,-1.5 ; 30.376,-8.176 30.376,-3.6 32.9,-3.6 32.9,-8.3 31,-8.3 30.5,-8.3 30.376,-8.176 ; 31.5,-1.5 31.5,5.2 34.2,5.2 34.2,-0.2 34.2,-1.5 32.8,-1.5 31.5,-1.5
  text "M74R3" at 3.15,2.333 h1 r270
  text "Top" at 1.483,1.333 h1 r270
Bottom Overlay:
  lines w0.15: 20.8,-2.2 20.8,-1.7 ; 28.5,-2.6 28.8,-2.3 29.4,-2.3
  lines w0.3: 36.862,-5.216 ccw(c37.862,-5.216) 37.862,-6.216 43.363,-6.216 ccw(c43.362,-5.216) 44.362,-5.216 44.362,0.284 ccw(c43.362,0.284) 43.362,1.284 37.862,1.284 ccw(c37.862,0.284) 36.862,0.284 36.863,-5.216
  text "Bot" at 1.45,-1.366 h1 r270
  text "M74R3" at 3.15,-2.333 h1 r270
  text "QRC" at 45,-4.1 h1.25 r270
Mechanical 1 -PCB:
  the board outline again, w0.1
Dimensioning:
  lines w0.1: -3.9,-5.8 -3.9,-2.9 -1,0 -1.635,0.635 ; 0,-6 35.1,-6 35.1,6 0,6 ; 14.6,12.6 17.5,12.6 20.4,9.7 21.035,10.335 ; 18.665,-10.435 19.3,-9.8 22.2,-12.7 25.1,-12.7 ; 42.57,-9.048 43.205,-8.413 50.507,-15.716 57.619,-15.716 ; 66.248,-7.73 65.613,-7.096 72.916,0.207 72.916,7.319 ; -1,-2.3 -1,2.3 0.5,2.3 0.5,-2.3 -1,-2.3 ; 17,-9.8 21.6,-9.8 21.6,-8.3 17,-8.3 17,-9.8 ; 18.1,8.2 18.1,9.7 22.7,9.7 22.7,8.2 18.1,8.2
  lines w0.2: 3.9,-10.1 3.9,19.9 7.4,23.4 9.8,23.4
  text "Cable tie 3mm" at 10.55,23.15 h1
  text "Perforated TAB" at 12,13.1 h1
  text "V-CUT" at 72.535,1.032 h1 r90
  text "Perforated TAB" at -4.4,-8.4 h1 r90
  text "Perforated TAB" at 16.7,-14.2 h1
  text "MILLING" at 51.333,-15.335 h1

## Dimensions
65.25,8.1 to 65.25,-8.1 on Dimensioning
0,-7.05 to 65.25,-8.1 on Dimensioning
8,-8.75 to 0,-7.05 on Dimensioning
8,8.75 to 8,-8.75 on Dimensioning
8,8.75 to 35.25,8.75 on Dimensioning
35.25,8.1 to 65.25,8.1 on Dimensioning